# EAGLE board esp32_main_card (EAGLE 9.6.2)
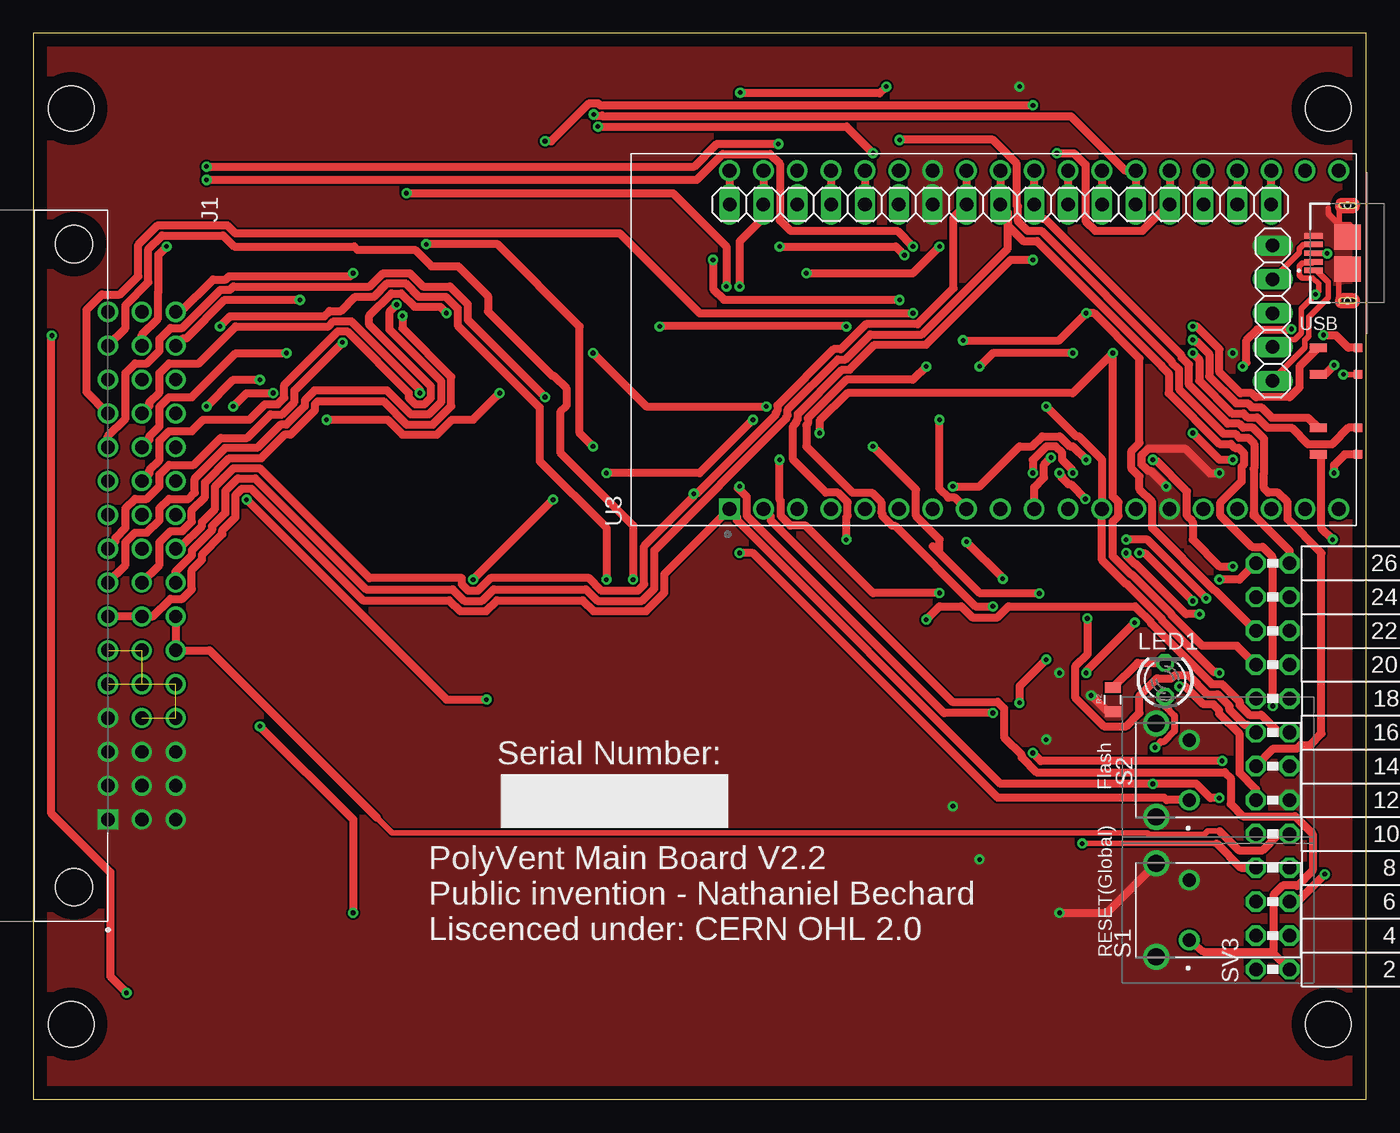
[diagram p0: board, top side]
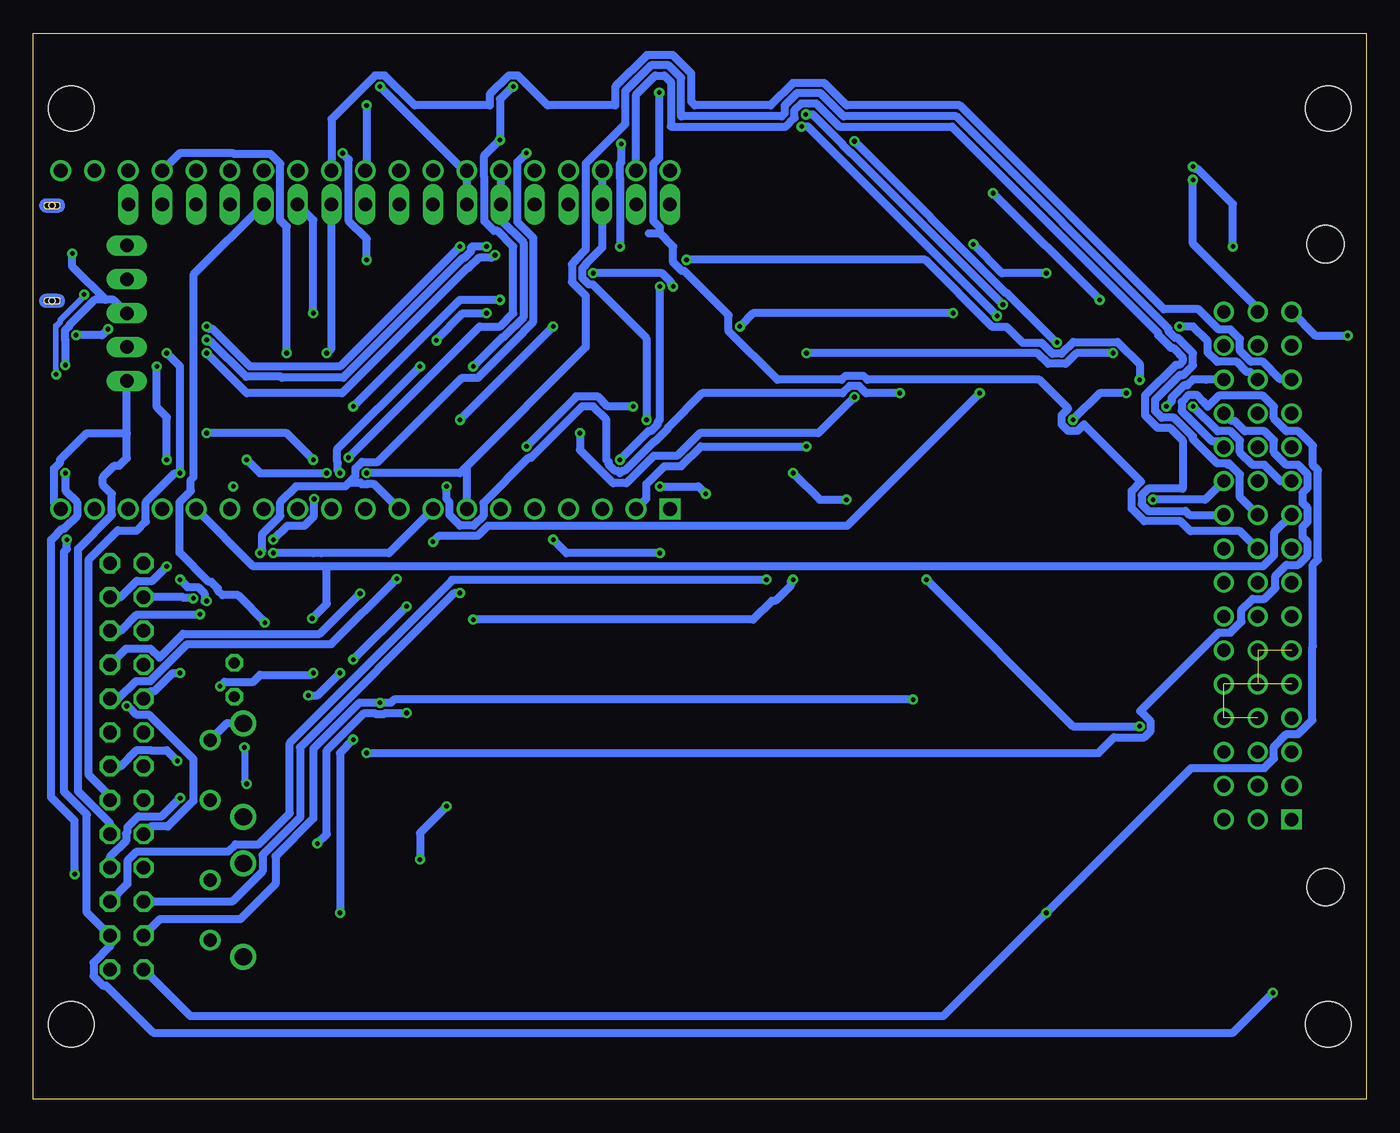
[diagram p1: board, bottom side, seen from below]

Size 100 x 80 mm. Coordinates in mm from the lower left corner, seen from the top.
Outline: 0,0 100,0 100,80 0,80 0,0
Copper layers (1*16): Top 0.035mm / dielectric 1.5mm / Bottom 0.035mm
Design rules "default": minimum track width 6mil, minimum drill 0.35mm, track to track 6mil, track to pad 6mil, pad to pad 6mil, via to via 6mil, smd to smd 6mil, copper to edge 40mil, drill to drill 6mil, minimum pad ring 10mil, minimum via ring 8mil, stop-mask expansion 4mil, vias tented up to drill 0mil, thermal gap 10mil
Net classes: 1 POWER: clearance 0.508 mm
Holes 3.4 mm at 2.84,5.64 2.84,74.36 97.16,74.36 97.16,5.64

## Footprints (pad centres in the part's own frame; a part is rotated, then mirrored left to right if it is on the bottom)
HARTING_09231486921 = drill 1 pad 1.35 square: 1 0,0 | drill 1 pad 1.35: 2 -2.54,0; 3 -5.08,0; 4 -7.62,0; 5 -10.16,0; 6 -12.7,0; 7 -15.24,0; 8 -17.78,0; 9 -20.32,0; 10 -22.86,0; 11 -25.4,0; 12 -27.94,0; 13 -30.48,0; 14 -33.02,0; 15 -35.56,0; 16 -38.1,0; 17 0,2.54; 18 -2.54,2.54; 19 -5.08,2.54; 20 -7.62,2.54; 21 -10.16,2.54; 22 -12.7,2.54; 23 -15.24,2.54; 24 -17.78,2.54; 25 -20.32,2.54; 26 -22.86,2.54; 27 -25.4,2.54; 28 -27.94,2.54; 29 -30.48,2.54; 30 -33.02,2.54; 31 -35.56,2.54; 32 -38.1,2.54; 33 0,5.08; 34 -2.54,5.08; 35 -5.08,5.08; 36 -7.62,5.08; 37 -10.16,5.08; 38 -12.7,5.08; 39 -15.24,5.08; 40 -17.78,5.08; 41 -20.32,5.08; 42 -22.86,5.08; 43 -25.4,5.08; 44 -27.94,5.08; 45 -30.48,5.08; 46 -33.02,5.08; 47 -35.56,5.08; 48 -38.1,5.08 | hole 2.8: -43.18,-2.54; 5.08,-2.54
GCT_USB3090-XX-X_REVE = smd 0.4 x 1.4: 1 -1.3,2.55; 2 -0.65,2.55; 3 0,2.55; 4 0.65,2.55; 5 1.3,2.55 | smd 0.1 x 0.1: 6 -3.87,0.63; 7 3.51,0.72 | smd 1.9 x 2: 8 -1.2,0; 9 1.2,0 | hole 0.45: -3.575,0; 3.575,0
1X17 = drill 1.016 long: 1 -20.32,0; 2 -17.78,0; 3 -15.24,0; 4 -12.7,0; 5 -10.16,0; 6 -7.62,0; 7 -5.08,0; 8 -2.54,0; 9 0,0; 10 2.54,0; 11 5.08,0; 12 7.62,0; 13 10.16,0; 14 12.7,0; 15 15.24,0; 16 17.78,0; 17 20.32,0
1X05 = drill 1.016 long: 1 -5.08,0; 2 -2.54,0; 3 0,0; 4 2.54,0; 5 5.08,0
LED3MM = drill 0.813 octagon: A -1.27,0; K 1.27,0
0805 = smd 0.8 x 1.2: 1 -0.9,0; 2 0.9,0
FSMRA4JH04 = drill 0.99 pad 1.54: 1 -2.54,-2.54; 2 1.96,-2.54 | drill 1.3 pad 1.95: 3 3.215,-0.05; 4 -3.795,-0.05
FE13-2W = drill 1.016 octagon: 1 -15.24,1.27; 2 -15.24,-1.27; 3 -12.7,1.27; 4 -12.7,-1.27; 5 -10.16,1.27; 6 -10.16,-1.27; 7 -7.62,1.27; 8 -7.62,-1.27; 9 -5.08,1.27; 10 -5.08,-1.27; 11 -2.54,1.27; 12 -2.54,-1.27; 13 0,1.27; 14 0,-1.27; 15 2.54,1.27; 16 2.54,-1.27; 17 5.08,1.27; 18 5.08,-1.27; 19 7.62,1.27; 20 7.62,-1.27; 21 10.16,1.27; 22 10.16,-1.27; 23 12.7,1.27; 24 12.7,-1.27; 25 15.24,1.27; 26 15.24,-1.27
MODULE_ESP32-DEVKITC-32D = drill 1.04 square: 1 -12.7,19.76 | drill 1.04: 2 -12.7,17.22; 3 -12.7,14.68; 4 -12.7,12.14; 5 -12.7,9.6; 6 -12.7,7.06; 7 -12.7,4.52; 8 -12.7,1.98; 9 -12.7,-0.56; 10 -12.7,-3.1; 11 -12.7,-5.64; 12 -12.7,-8.18; 13 -12.7,-10.72; 14 -12.7,-13.26; 15 -12.7,-15.8; 16 -12.7,-18.34; 17 -12.7,-20.88; 18 -12.7,-23.42; 19 -12.7,-25.96; 20 12.7,19.76; 21 12.7,17.22; 22 12.7,14.68; 23 12.7,12.14; 24 12.7,9.6; 25 12.7,7.06; 26 12.7,4.52; 27 12.7,1.98; 28 12.7,-0.56; 29 12.7,-3.1; 30 12.7,-5.64; 31 12.7,-8.18; 32 12.7,-10.72; 33 12.7,-13.26; 34 12.7,-15.8; 35 12.7,-18.34; 36 12.7,-20.88; 37 12.7,-23.42; 38 12.7,-25.96
CL-SB-23A-11T = smd 0.635 x 1.27: 1 2.5,3.4; 2 4.5,3.4; 5 10.5,3.4; 6 8.5,3.4 | smd 0.635 x 0.635: 3 2.5,0.4; 4 4.5,0.4; 7 10.5,0.4; 8 8.51,0.4

## Placement (x,y rotation side)
J1  09231486921  [HARTING_09231486921]  5.6,21 270 top
J2  USB3090-XX-X_REVE  [GCT_USB3090-XX-X_REVE]  98.6,63.5 90 top
JP1  [1X17]  72.56,67.16 180 top
JP2  [1X05]  93,59 270 top
LED1  [LED3MM]  84.93,31.49 90 top
R2  180  [0805]  81,30 90 top
S1  FSMRA4JH04  [FSMRA4JH04]  84.2,14.5 90 top
S2  FSMRA4JH04  [FSMRA4JH04]  84.2,25 90 top
SV3  [FE13-2W]  93,25 90 top
U3  ESP32-DEVKITC-32D  [MODULE_ESP32-DEVKITC-32D]  72,57 90 top
U$1  CL-SB-23A-11T  [CL-SB-23A-11T]  99.8,45.9 90 top

## Library data of the parts
J1 = din41612_48_pin_board; MANUFACTURER-PART-NUMBER: 09231486921; PACKAGE: None
J2 = USB3090-XX-X_REVE; MANUFACTURER-PART-NUMBER: USB3090-30-A; PACKAGE: None; SIMILAR-COMPONENTS: MCR-B-S-RA-SMT-CS5A-NF-T/R
JP1 = pinhead; MANUFACTURER-PART-NUMBER: SLW-117-01-T-S; PACKAGE: 2.54 mm header; SIMILAR-COMPONENTS: https://www.adafruit.com/product/3008
JP2 = pinhead
LED1 = led; MANUFACTURER-PART-NUMBER: Generic green 3mm LED; PACKAGE: none
R2 = SparkFun-Passives; MANUFACTURER-PART-NUMBER: Generic; PACKAGE: 0805; SIMILAR-COMPONENTS: Generic 0805 resistors
S1 S2 = FSMRA4JH04; MANUFACTURER-PART-NUMBER: FSMRA4JH04; PACKAGE: None
SV3 = con-lsta; MANUFACTURER-PART-NUMBER: generic 13x2 right angle header, male or female; PACKAGE: 13x2 2.54mm header
U3 = ESP32-DEVKITC-32D; MANUFACTURER-PART-NUMBER: ESP32-DEVKITC-32D, SLW-119-01-T-S < buy two of these; PACKAGE: None; SIMILAR-COMPONENTS: none, https://www.adafruit.com/product/3008
U$1 = CL-SB-23A-11T; MANUFACTURER-PART-NUMBER: CL-SB-23A-11T; PACKAGE: None

## Nets
3.3V: J1.7 J1.23 LED1.A SV3.8 U3.1
5V: J1.38 J1.39 J2.1 JP2.5 SV3.10 U3.19
24V/12V [POWER]: J1.5 J1.6 J1.20 J1.21 J1.22 J1.36 J1.37
CS_1: J1.8 JP1.5 SV3.11 U3.32
CS_2: J1.9 JP1.8 SV3.13 U3.29
CS_3: J1.10 SV3.15 U3.15
CS_4: J1.11 SV3.17 U3.12
CS_5: J1.12 JP1.2 SV3.19 U3.35
CS_6: J1.13 JP1.6 SV3.21 U3.31
CS_7: J1.14 JP1.7 SV3.23 U3.30
CS_8: J1.24 SV3.25 U3.9
CS_9: J1.25 SV3.26 U3.10
CS_10: J1.26 SV3.24 U3.7
CS_11: J1.27 SV3.22 U3.8
CS_12: J1.28 SV3.20
CS_13: J1.29 SV3.18
CS_14: J1.30 SV3.16
CS_15: J1.45 SV3.14
GND: J1.1 J1.2 J1.3 J1.4 J1.17 J1.18 J1.19 J1.33 J1.34 J1.35 J2.5 J2.6 J2.7 J2.8 J2.9 JP1.11 JP2.1 R2.1 S1.2 S1.3 S1.4 S2.2 S2.3 S2.4 SV3.12 U3.14 U3.26
IO0: JP1.4 S2.1 U3.33
MISO: J1.41 JP1.10 SV3.7 U3.27
MOSI: J1.42 JP1.16 SV3.5 U3.21
N$1: J2.4 JP2.2
N$2: JP1.17 U3.20
N$3: JP1.14 U3.23
N$4: JP1.13 U3.24
N$6: JP1.3 U3.34
N$7: JP1.1 U3.36
N$9: LED1.K R2.2
RESET: J1.48 S1.1 SV3.2 U3.2
SCK: J1.40 JP1.9 SV3.9 U3.28
SCL: J1.44 JP1.15 SV3.1 U3.22
SDA: J1.43 JP1.12 SV3.3 U3.25
USB0_D+_IN: J2.3 JP2.3 U$1.6
USB0_D-_IN: J2.2 JP2.4 U$1.8
USB1_D+: J1.16 SV3.4 U$1.1
USB1_D-: J1.15 SV3.6 U$1.3
USB2_D+: J1.32 U$1.2
USB2_D-: J1.31 U$1.4
USB3_D+: J1.47 U$1.5
USB3_D-: J1.46 U$1.7

## Tracks (layer width: path | path; a pad name or v marks a point on that pad's centre or on a via)
3.3V  (via drill 0.35)
  Top 0.508: LED1.A 84.93,29.49 85.63,28.79 85.63,27.64 84.82,26.83 84.59,26.83 v84.17,26.41
  Top 0.61: J1.7 J1.23 8.97,36.24 10.3,37.57 11.18,37.57 11.89,38.28 11.89,39.74 12.65,40.5 12.65,40.89 14.18,42.41 14.18,42.7 15.16,43.68 15.16,45.35 15.65,45.84 16.35,45.84 24.73,37.45 31.21,37.45 32.02,36.64 33.98,36.64 34.79,37.45 41.21,37.45 42.02,36.64 45.98,36.64 47.36,38.02 47.36,39.42 U3.1 52.78,43.76 52.78,43.47 72.57,23.68 v84,23.68 86.22,23.68 86.23,23.69 87.25,23.69 88.33,22.61 v88.99,22.61
  Bottom 0.508: v84.17,26.41 84.17,23.85 v84,23.68
  Bottom 0.61: v88.99,22.61 90.36,21.24 92.13,21.24 92.95,20.43 92.95,20.05 93.05,19.95 93.05,19.41 94.27,18.2 SV3.8
5V
  Top 0.406: JP2.5 93,54 95.41,56.41 95.41,56.98 95.69,57.27 95.69,58.69 97.16,60.16 97.16,61.34 96.3,62.2 J2.1 | 89,20.14 88.14,20.14 87.87,19.87 83.7,19.87 83.57,20 26.92,20 25.46,21.46
  Top 0.61: J1.39 J1.38 13.22,33.7 25.46,21.46 25.78,21.14 | SV3.10 93.45,19.92 92.23,18.7 90.44,18.7 89,20.14
  Bottom 0.61: SV3.10 94.27,20.74 96.66,23.12 96.66,41.31 94.12,43.85 94.12,45.44 94.8,46.12 94.8,46.7 93.94,47.56 93.55,47.56 93,48.12 93,50 | 93,50 JP2.5 | U3.19 98.44,44.78 98.44,47.35 98,47.79 98,48 96,50 93,50
24V/12V  (6 unrouted)
CS_1  (via drill 0.35)
  Top 0.61: J1.8 6.93,40.11 6.93,41.82 7.64,42.53 8.52,42.53 9.47,43.48 9.47,44.36 10.18,45.07 11.66,45.07 12.12,45.53 12.12,46.61 14.39,48.88 16.78,48.88 18.54,50.64 18.98,50.64 20.36,52.02 20.36,52.46 21.1,53.2 26.54,53.2 28.34,51.4 29.66,51.4 30.6,52.34 30.6,53.9 26.75,57.75 | v42.04,73.91 42.04,73.83 42.71,73.83 42.78,73.76 77.87,73.76 81.93,69.7 U3.32 JP1.5 | v79,32 79,32.14 v82.64,35.78 | 26.75,57.75 26.7,57.8 | 26.75,57.75 26.75,59.13 v27.26,59.64 | SV3.11 91.73,23.28 90.51,24.5 90.51,27.42 88.99,28.94 88.99,29.21 88.55,29.64 87.79,29.64 86.43,31 v86,31
  Bottom 0.61: v42.04,73.91 41.52,73.91 39.23,71.62 39.23,71.55 38.75,71.06 38.68,71.06 v27.26,59.64 | v82.64,35.78 82.64,35.82 84.65,37.84 85.83,37.84 86.17,38.16 86.17,38.35 86.65,38.84 86.83,38.84 89.04,41.04 89.04,44.81 88.19,45.66 88.19,46.49 88,46.68 88,61.88 JP1.5 | v86,31 85.66,31.34 83.51,31.34 83,31.85 79.15,31.85 v79,32
CS_2  (via drill 0.35)
  Top 0.61: J1.9 6.17,41.89 6.17,42.14 6.93,42.9 6.93,44.36 7.64,45.07 8.52,45.07 9.47,46.02 9.47,46.9 10.18,47.61 12.04,47.61 14.08,49.65 16.05,49.65 17.8,51.4 18.66,51.4 19.6,52.34 19.6,53.2 v23.2,56.8 | v75,74.6 42.54,74.6 42.39,74.74 41.7,74.74 38.85,71.9 v38.4,71.9 | SV3.13 93.05,26.32 94.78,26.32 95.05,26.6 95.8,26.6 96.66,27.46 96.66,41 94.12,43.54 94.12,44.81 93.39,45.54 92.66,45.54 92.34,45.86 92.34,47 92.36,47.02 92.36,49.56 91.51,50.41 90.79,50.41 90.49,50.71 89.62,50.71 86.71,53.62 86.71,55.16 86.65,55.16 86.17,55.65 86.17,55.81 75.93,66.05 75.42,66.05 75.1,66.37 JP1.8 U3.29
  Bottom 0.61: v75,74.6 75,69.8 U3.29 | v38.4,71.9 26.98,60.48 26.91,60.48 23.23,56.8 v23.2,56.8
CS_3  (via drill 0.35)
  Top 0.61: SV3.15 91.17,28.1 90.91,28.1 89.75,29.26 89.75,29.52 88.87,30.4 88.11,30.4 86.67,31.84 85.65,31.84 85.42,31.6 84.31,31.6 83,30.29 83,29 82,28 80.33,28 78.17,30.16 78.17,32.47 79.09,33.4 v79.09,36.09
  Bottom 0.61: J1.10 6.93,42.53 6.93,40.82 7.75,40 78,40 | U3.15 83.5,40 78,40 | v79.09,36.09 78,37.18 78,40
CS_4  (via drill 0.35)
  Top 0.61: v89,32 88.93,32.07 88.59,32.07 84.64,36.02 84.64,36.1 82.1,38.64 82.02,38.64 80.18,40.48 U3.12 80.18,48 78.42,49.76 78.24,49.76 v76,52 | v13,52 15,54 v17,54 | v51,63 51,60.82 51.82,60 v65,60
  Bottom 0.61: SV3.17 91.17,30.64 90.91,30.64 89.55,32 v89,32 | v13,52 11.15,50.15 10.18,50.15 9.47,49.44 9.47,48.56 8.52,47.61 7.64,47.61 6.43,46.4 J1.11 | v51,63 33.08,63 28.05,57.97 26.96,57.97 25.76,56.76 24.34,56.76 23.55,55.97 22.85,55.97 21.98,56.84 18.65,56.84 17,55.18 v17,54 | v65,60 68,60 v76,52
CS_5  (via drill 0.35)
  Top 0.61: SV3.19 90.31,34.03 87.71,34.03 85.4,36.34 85.4,36.42 82.42,39.4 82.34,39.4 81,40.74 81,43.37 81.42,43.79 81.42,44.81 81,45.23 v81,56 78,53 61.08,53 59,50.92 v59,50 | J1.12 5.6,49.77 6.93,51.1 6.93,54.52 7.64,55.23 8.52,55.23 9.47,56.18 9.47,57.06 10.3,57.89 11.18,57.89 14.05,60.76 14.76,60.76 15,61 25.25,61 26.25,62 28.23,62 29.24,61 31.26,61 32.6,59.66 32.6,58.5 v38.4,52.7 | U3.35 JP1.2
  Bottom 0.61: v81,56 81,65.49 81.48,65.98 81.48,70.21 82.21,70.94 84.94,70.94 85,71 89.04,71 U3.35 | v38.4,52.7 41.1,50 50,50 51.72,48.28 53.46,48.28 55.5,46.24 56.5,46.24 59,48.74 v59,50
CS_6  (via drill 0.35)
  Top 0.61: SV3.21 88.72,38.16 88.65,38.16 83.96,42.86 83.96,44.81 83,45.77 83,46.74 82.4,47.34 82.4,48.66 83,49.26 83,55.6 79.6,59 v79,59 76.96,56.96 v69.76,56.96 | J1.13 4,53.08 4,59.26 5.14,60.4 6.5,60.4 7.88,61.78 7.88,64.14 9.34,65.6 14.56,65.6 15.15,65 44,65 50,59 v66,59 | U3.31 JP1.6
  Bottom 0.61: v79,59 79,65.98 JP1.6 | v69.76,56.96 69.76,57.03 67.79,59 v66,59
CS_7  (via drill 0.35)
  Top 0.61: v88,37.6 83.6,42 v82,42 | v77,47 77.17,46.84 77.17,46.65 77.65,46.16 77.83,46.16 v78.94,45.06 | U3.30 JP1.7 | v78,56 72,56 v71,55
  Bottom 0.61: J1.14 6.43,54.02 7.76,55.35 8.64,55.35 9.47,56.18 9.47,57.06 10.18,57.77 11.06,57.77 12.59,59.3 15.2,59.3 30.5,74.6 38.98,74.6 40.65,76.27 43.02,76.27 44.69,74.6 50.37,74.6 50.64,74.88 50.64,76.98 52.02,78.36 53.98,78.36 56.36,75.98 56.36,74.6 61.42,74.6 63.65,76.83 64.35,76.83 65.76,75.42 65.76,74.6 71.4,74.6 73.64,76.83 74.36,76.83 77.64,73.56 U3.30 | v82,42 80.94,43.06 79.67,43.06 78.94,43.79 v78.94,45.06 | SV3.23 88.78,37.7 88.71,37.63 88.03,37.63 v88,37.6 | v77,47 77.17,47.16 77.17,47.78 77.19,47.81 77.19,48.8 v71,55 | v78,56 77.64,56.36 JP1.7
CS_8  (via drill 0.35)
  Top 0.61: J1.24 9.47,40.11 9.47,41.82 10.3,42.65 11.18,42.65 11.89,43.36 11.89,44.23 12.88,45.22 12.88,46.29 14.71,48.12 17.1,48.12 18.86,49.88 19.29,49.88 21.12,51.71 21.12,52.14 21.36,52.39 26.28,52.39 28.02,50.64 29.98,50.64 31.36,52.02 31.36,54.22 27.7,57.88 v27.7,58.8 27.68,58.8 | v42.36,73 61.03,73 v63.01,71.01 | SV3.25 90.49,39 v89,39 | v83,41 83.4,41 v87,37.4
  Bottom 0.61: v42.36,73 41.9,73 v27.7,58.8 | v87,37.4 87.17,37.4 87.17,37.95 87.65,38.44 88.44,38.44 v89,39 | v83,41 82.83,41.16 82.83,42.44 81.48,43.79 81.48,44.81 80.3,46 76.61,46 76.31,46.3 | v63.01,71.01 63.69,70.34 63.69,65.84 62.48,64.63 62.48,58.37 63.24,57.61 63.24,57.58 66.65,54.16 67.83,54.16 74.17,47.84 75.35,47.84 75.83,47.35 75.83,46.77 76.31,46.3 | 76.31,46.3 75.49,46.3 75.35,46.16 75,46.16 74.42,46.16 U3.9
CS_9  (via drill 0.35)
  Top 0.61: SV3.26 94.27,41.16 91.64,43.79 91.64,43.93 91.58,44 | v65,72 72.01,72 73.8,70.21 73.8,67.08 73.88,67 73.88,65.89 74.59,65.18 75.62,65.18 85.4,55.4 85.4,55.34 85.95,54.79 85.95,53.31 89.31,49.95 90.17,49.95 90.47,49.65 91.15,49.65 91.6,49.2 91.6,47.34 91.58,47.32 91.58,44 | 91.58,44 91.58,43.79 | v64,76 63.49,75.49 53.1,75.49 v53.04,75.55 | U3.10 75.1,45.92 75.83,46.65 75.83,47.63 v76.36,48.16
  Bottom 0.61: J1.25 9.47,42.65 13.18,42.65 13.94,43.4 16.66,43.4 17.6,44.34 17.6,45.66 16.9,46.36 21.18,50.64 21.65,50.16 22.35,50.16 22.84,50.65 22.84,51.35 22.36,51.82 24.53,54 37.44,54 37.74,54.3 39.06,54.3 39.36,54 44.18,54 47.84,57.65 47.84,58.84 51.16,62.16 51.35,62.16 52,62.82 52,64 53,65 | 53.82,65 53,65 | 53,65 53,65.43 53.48,65.91 53.48,70.21 53.04,70.65 v53.04,75.55 | v64,76 64.06,76 65,75.06 v65,72 66.18,70.82 66.18,69.19 66.16,69.17 66.16,65.89 65.44,65.18 65.18,65.18 64,64 64,59 65,58 66.52,58 v76.36,48.16
CS_10  (via drill 0.35)
  Top 0.61: v78,47 77.93,47.07 77.93,47.26 77.19,47.99 77.19,48.51 76.71,48.99 76.01,48.99 75,47.98 v75,47 | v90,40 89,40 87,42 87,43.35 86.56,43.79 86.56,45.62 84.25,47.93 84.07,47.93 v84,48
  Bottom 0.61: 10.18,47.61 9.47,46.9 9.47,45.19 J1.26 | 10.18,47.61 10.35,47.61 | 10.18,47.61 10.3,47.73 11.18,47.73 13,49.55 13,49.74 14.42,51.16 15.35,51.16 15.84,51.65 15.84,52.5 13.98,54.36 13.72,54.36 13,55.08 13,56 14.16,57.16 14.35,57.16 14.84,57.65 14.84,57.84 30.76,73.76 39.22,73.76 40.97,75.51 42.71,75.51 43.64,74.57 43.64,73.98 43.86,73.76 51.4,73.76 51.4,76.66 52.34,77.6 53.66,77.6 55.6,75.66 55.6,73.18 58.56,70.22 58.56,63.77 59.33,63 59.33,62.93 59.6,62.66 59.6,61.34 58.56,60.3 58.56,56.44 67.48,47.52 | SV3.24 93.45,37.7 92.23,38.92 91.08,38.92 v90,40 | v84,48 83,47 v78,47 | U3.7 67.48,47.52 | 67.48,47.52 68,47 v75,47
CS_11  (via drill 0.35)
  Top 0.61: v87.51,36.41 86.49,36.41 82.73,40.16 82.65,40.16 82,40.82 v82,41 | J1.27 8.71,46.97 8.71,47.22 9.47,47.98 9.47,49.44 10.18,50.15 11.89,50.15 12.74,51 16.22,51 17.38,52.16 18.35,52.16 18.84,52.65 18.84,53.62 22.85,57.63 23.55,57.63 28.16,53.02 28.16,52.65 28.65,52.16 29.35,52.16 29.84,52.65 29.84,53.5 25.2,58.14 25.2,58.8 26.88,60.48 27.6,60.48 28.61,59.48 30.52,59.48 v31,59 | v47,58 47.04,58.04 60.96,58.04 v61,58 | U3.8 69.16,45.16 68.65,45.16 68,45.82 v68,51
  Bottom 0.61: SV3.22 93.45,35.16 92.23,36.38 87.54,36.38 v87.51,36.41 | v82,41 79,41 78.4,41 73.32,41 U3.8 | v31,59 46,59 v47,58 | v68,51 v61,58
CS_12  (via drill 0.35)
  Top 0.61: v75.49,37.97 71.03,37.97 68,41 | 67.48,41.52 68,41 | v19,56 15.2,56 11.89,52.69 10.18,52.69 9.47,51.98 9.47,50.52 8.71,49.76 8.71,49.51 J1.28 | v42,56 46,52 v55,52 | 68,41 68,42.03 66.24,43.79 66.24,45.76 v63,49
  Bottom 0.61: SV3.20 93.05,33.84 91.22,33.84 90.55,33.16 88.78,34.93 78.53,34.93 v75.49,37.97 | v19,56 21.74,56 22.54,55.2 23.86,55.2 24.66,56 v42,56 | v55,52 56.92,52 57.68,52.76 59.32,52.76 59.32,52.68 v63,49
CS_13  (via drill 0.35)
  Top 0.61: v72.74,39.06 72.74,39.12 v70.02,41.84 | J1.29 8.71,52.05 8.71,52.3 9.47,53.06 9.47,54.52 10.18,55.23 12.41,55.23 15.18,58 22.14,58 22.54,58.4 23.86,58.4 29,53.26 v29,53
  Bottom 0.61: SV3.18 93.62,30.08 92.3,31.4 91.22,31.4 88.46,34.16 77.66,34.16 72.76,39.06 v72.74,39.06 | v29,53 38.94,43.06 65.89,43.06 66.65,42.3 69.56,42.3 v70.02,41.84
CS_14  (via drill 0.35)
  Top 0.61: v43,39 43,42.9 38,47.9 38,51.92 31.84,58.08 31.84,59.35 30.94,60.24 28.92,60.24 27.92,61.24 26.56,61.24 25.56,60.24 24.16,60.24 23.08,59.16 22.22,59.16 21.82,58.76 14.76,58.76 v14,58 | SV3.16 93.45,27.54 92.13,28.86 91.22,28.86 90.51,29.57 90.51,29.84 89.18,31.16 88.42,31.16 83.88,35.71 83.88,35.78 82.66,37 73.18,37 72.35,36.16 70.46,36.16 69.62,37 68,37 v67,36
  Bottom 0.61: J1.30 8.71,54.59 8.96,54.59 9.72,55.35 11.18,55.35 11.89,56.06 11.89,56.89 13,58 v14,58 | v67,36 46,36 44.6,37.4 44.34,37.4 43.16,38.58 43.16,38.84 v43,39
CS_15  (via drill 0.35)
  Top 0.61: v89.2,25.4 75.6,25.4 v75,26
  Bottom 0.61: SV3.14 93.45,25 92.23,26.22 91.22,26.22 91.21,26.2 90,26.2 v89.2,25.4 | v75,26 20.09,26 18.93,27.16 16.65,27.16 16.16,27.65 16.16,28.35 16.96,29.14 11.06,35.03 10.18,35.03 9.35,35.86 9.35,36.74 8.52,37.57 7.64,37.57 6.81,38.4 6.81,39.28 5.98,40.11 5.1,40.11 4.39,40.82 4.39,41.82 4.76,42.2 4.76,42.98 4.39,43.36 4.39,44.36 4.76,44.73 4.76,45.52 4.39,45.9 4.39,46.9 5.1,47.61 5.98,47.61 6.93,48.56 6.93,49.44 7.64,50.15 9.1,50.15 9.86,50.91 10.11,50.91 J1.45
GND  (via drill 0.35)
  Top 0.406: 98,62 97.97,61.97 J2.6 | J2.7 98,66.89 98,65 | 98,65.63 98,65.3 J2.9 98.78,64.88 98.78,65.63 98,65.63 | 97.16,66.89 97.16,66.48 98,65.63
  Top 0.61: v85,46 83.83,47.16 83.65,47.16 83.17,47.65 83.17,48.35 83.65,48.84 86.42,48.84 88.26,47 v89,47 | R2.1 80.59,29.1 v79.37,30.32 | v77,14 80.53,14 S1.3
  Bottom 0.61: SV3.12 94.27,22.77 95.84,24.35 95.84,40.52 93.66,42.71 92.22,42.71 91.58,43.35 91.58,44.81 89.39,47 v89,47 89,55 v90,56 | 84.96,46 v85,46 | JP1.11 67.48,69.48 v74,76 | v79.37,30.32 78.68,30.32 v77,32 | v76,27 77,26 v77,14 | S2.3 85.48,28.21 S2.2 | v69,22 71,20 v71,18
  pour Top (no thermals): 0,0 0,80 100,80 100,0
IO0  (via drill 0.35)
  Top 0.61: U3.33 JP1.4 85.21,67.16 83.22,65.18 79.67,65.18 78.94,65.91 78.94,70.15 78.09,71 v76.81,71 | S2.1 85.02,22.46 84.84,22.64 72.36,22.64 54,41 v53,41 | v61,42 61,43.69 61.1,43.79 61.1,44.81 60.37,45.54 59.46,45.54 57,48 57,50.52 57.24,50.76 57.24,50.9 57.36,51.02 57.36,51.44 60.68,54.76 61.24,54.76 63.12,56.64 66.98,56.64 73.34,63 v75,63
  Bottom 0.61: v61,42 60,41 v53,41 | v75,63 75,64.57 76.34,65.91 76.34,70.53 v76.81,71
MISO  (via drill 0.35)
  Top 0.406: 88.8,19.2 v78.7,19.2
  Top 0.61: v72,29 68.33,29 53.54,43.79 53.54,45.2 52.87,45.87 v53,46 | U3.27 JP1.10 69.06,66.19 69.06,60.87 66.35,58.16 62.47,58.16 60.59,56.29 60.05,56.29 55.84,52.07 55.84,51.65 55.71,51.53 55.71,51.41 49.76,45.45 v49.55,45.45 49.55,45.24 45.84,41.53 45.84,38.65 45.35,38.16 42.65,38.16 41.7,39.12 34.3,39.12 33.35,38.16 32.65,38.16 32.16,38.65 32.16,39.12 25.22,39.12 16.98,47.36 15.02,47.36 13.64,45.98 13.64,44.32 12.65,43.33 12.65,43.04 11.13,41.52 11.13,41.51 10.94,41.32 J1.41 | SV3.7 90.62,17.38 88.8,19.2
  Bottom 0.61: v78.7,19.2 78,19.9 78,26.18 75.18,29 74.42,29 74.35,28.93 73.65,28.93 73.58,29 v72,29 | v53,46 50.11,46 v49.55,45.45
MOSI  (via drill 0.35)
  Top 0.61: v68,38 63,38 57.94,43.06 56.81,43.06 56.08,43.79 56.08,44.92 56,45 v56,48 | v53,61 53,64.38 54.78,66.16 JP1.16 U3.21
  Bottom 0.61: J1.42 13.25,43.86 13.56,44.16 16.35,44.16 16.84,44.65 16.84,45.35 16.35,45.84 13.76,45.84 13.76,49.42 14.74,50.4 15.66,50.4 16.6,51.34 16.6,52.82 14.29,55.12 14.03,55.12 13.76,55.39 13.76,55.68 14.48,56.4 14.66,56.4 15.6,57.34 15.6,57.52 31.08,73 39.54,73 41.28,74.74 42.39,74.74 42.88,74.25 42.88,73.66 43.54,73 52.16,73 52.16,76.35 52.65,76.83 53.35,76.83 54.78,75.4 U3.21 | v53,61 53,51 53.16,50.84 53.16,50.65 53.65,50.16 53.84,50.16 v56,48 | 91.73,14.86 SV3.5 85.1,14.84 82.82,17.12 82.82,18.34 80,21.16 80,26.43 68.43,38 v68,38
N$1
  Top 0.406: J2.4 96,64.15 95.3,64.15 94.99,63.85 94.99,63.53 JP2.2
N$2
  Top 0.61: U3.20 JP1.17
N$3
  Top 0.61: U3.23 JP1.14
N$4
  Top 0.61: U3.24 JP1.13
N$6
  Top 0.61: U3.34 JP1.3
N$7
  Top 0.61: JP1.1 U3.36
N$9
  Top 0.61: R2.2 82.86,32.76 LED1.K
RESET  (via drill 0.35)
  Top 0.61: v24,62 23.76,61.76 14.68,61.76 14.45,61.52 13.49,61.52 11.06,59.1 J1.48 | U3.2 55.32,43.76 55.32,43.47 68.96,29.84 72.35,29.84 72.83,29.35 72.83,27.16 74.17,25.84 74.17,25.65 75.28,24.54 89.42,24.54 89.83,24.13 89.83,22.16 90.76,21.24 94.67,21.24 96,19.91 96,17.17 94.83,16 94.78,16.06 93.77,16.06 93.05,15.35 93.05,10.98 | v42,49 41,50 41,58 34.84,64.17 v29.48,64.17 | S1.1 87.8,11.08 92.95,11.08 93.05,10.98 | 93.05,10.98 SV3.2
  Bottom 0.61: v24,62 27.32,62 v29.48,64.17 | U3.2 54,45.08 54,46.18 52.66,47.52 51.4,47.52 49.92,49 v42,49
SCK  (via drill 0.35)
  Top 0.61: v93,29.52 92.95,29.57 92.95,40.74 92.23,41.46 91.43,41.46 89.04,43.85 89.04,44.75 90.64,46.35 90.64,47.46 90.83,47.65 90.83,48.5 90.44,48.89 90.16,48.89 89.86,49.19 88.99,49.19 85.19,52.99 85.19,54.47 84.64,55.02 84.64,55.08 75.3,64.42 74.28,64.42 73.12,65.58 | U3.28 JP1.9 73.12,66.6 73.12,65.58 | 73.12,65.58 73.12,63.86 66.66,57.4 62.8,57.4 60.92,55.52 60.37,55.52 56.6,51.75 56.6,51.34 56.48,51.22 56.48,51.08 46.6,41.2 46.6,38.34 45.66,37.4 42.34,37.4 41.46,38.28 34.54,38.28 33.66,37.4 32.34,37.4 31.46,38.28 24.98,38.28 16.66,46.6 15.34,46.6 14.4,45.66 14.4,44 13.41,43.01 13.41,42.73 11.89,41.2 11.89,40.82 10.68,39.61 J1.40
  Bottom 0.61: SV3.9 91.17,20.48 89.91,20.48 88,22.39 88,25.53 91.33,28.86 92.23,28.86 92.9,29.52 v93,29.52
SCL  (via drill 0.35)
  Top 0.61: v54,51 50,47 v43,47 | v39,45 v33,39 | v17,28 24,21 v24,14
  Bottom 0.61: SV3.1 88.23,6.26 31.74,6.26 v24,14 13.13,24.87 7.64,24.87 6.93,25.58 6.93,26.46 5.98,27.41 5.1,27.41 4.03,28.47 4.03,33.97 4,34 4,40.13 3.63,40.5 3.63,47.22 4,47.59 4,49.05 5.1,50.15 5.98,50.15 6.93,51.1 6.93,51.98 7.76,52.81 11.06,52.81 11.89,51.98 12.16,52.26 12.16,52.35 12.65,52.84 13.35,52.84 13.84,52.35 13.84,51.65 11.57,49.39 11.13,49.39 J1.44 | U3.22 JP1.15 57.32,63.93 58.57,62.68 58.57,62.61 58.84,62.35 58.84,61.65 58.35,61.16 58.05,61.16 54,57.12 v54,51 | v43,47 41,45 v39,45 | v33,39 22,28 v17,28
SDA  (via drill 0.35)
  Top 0.61: v16,45 31,30 v34,30 | v67,55 66,54 61,54 58.12,51.12 58.12,50.71 58,50.59 58,49 61.46,45.54 62.91,45.54 63.64,44.81 63.64,44.07 63.7,44 63.7,43.79 64.43,43.06 64.64,43.06 70.7,37 v72,37 | v76,33 74,31 v74,29.76
  Bottom 0.61: J1.43 12.08,45 v16,45 | v34,30 72.95,30 73.19,29.76 v74,29.76 75.55,29.76 79,26.31 79,21.08 81.83,18.25 81.83,16.16 84.48,13.52 90.51,13.52 SV3.3 | U3.25 JP1.12 64.94,66.02 63.24,64.32 63.24,58.68 64.68,57.24 64.76,57.24 v67,55 | v72,37 v76,33
USB0_D+_IN  (via drill 0.35)
  Top 0.406: v97.08,63.48 96.08,63.48 J2.3
  Top 0.61: v97.6,55.1 96.9,54.4 U$1.6
  Bottom 0.61: JP2.3 94,60 94.59,60 | v97.08,63.48 97.08,62.49 94.59,60 | 94.59,60 95.4,60 97.34,58.06 97.34,57.99 97.64,57.69 97.64,57 97.6,56.97 v97.6,55.1
USB0_D-_IN  (via drill 0.35)
  Top 0.406: J2.2 95.96,62.76 95.21,62.76 94.99,62.55 94.99,61.85 95.21,61.64 96,61.64 96.44,61.2 96.44,60.64 v96.2,60.4 95.13,59.33 95.13,57.5 94.66,57.02 93.56,57.02 JP2.4 | v98.31,54.41 v98.3,54.4 U$1.8
  Bottom 0.406: v98.3,54.4 98.3,54.76 98.33,54.8 98.33,58 | 98.33,58.07 98.33,58 | 98.33,58 98,58.33 98,58.48 96.2,60.28 v96.2,60.4
USB1_D+  (via drill 0.35)
  Top 0.61: v7,8 5.78,9.22 5.78,17.05 1.32,21.51 1.32,57.32 v1.39,57.32 | v97.49,42 96.66,42.84 96.66,48.14 U$1.1
  Bottom 0.61: J1.16 3.82,57.32 v1.39,57.32 | v7,8 10,5 91,5 94.54,8.54 94.78,8.54 95.49,9.26 95.49,10.27 94.27,11.48 SV3.4 96,14.03 96,21.39 97.69,23.08 97.69,41.1 97.49,41.3 v97.49,42
USB1_D-  (via drill 0.35)
  Top 0.61: J1.15 6.93,57.89 6.93,59.6 8.64,61.31 8.64,63.82 9.65,64.83 14.24,64.83 15.08,64 24.08,64 24.32,63.76 28.63,63.76 29.87,62.52 31.89,62.52 34.12,60.29 34.12,59.13 38.96,54.3 39.06,54.3 40,53.36 40,52.04 39.52,51.56 39.52,48.56 45,43.08 v45,39 | 97.61,47.19 v97.61,47 97.61,47.61 98.4,48.4 U$1.3 | v96.91,16.9 94.85,14.84 SV3.6
  Bottom 0.61: v45,39 68.61,39 68.61,38.9 80.76,26.75 80.76,21.48 83.09,19.15 84.84,19.15 85.39,18.6 92.23,18.6 92.95,17.89 92.95,16.16 SV3.6 | v97.61,47 97.61,45.7 96.72,44.81 96.72,43.79 97.67,42.84 97.84,42.84 98.68,41.99 98.68,22.68 96.91,20.91 v96.91,16.9 96.98,16.97
USB2_D+  (via drill 0.35)
  Top 0.61: v66,64 64.82,65.18 56.81,65.18 56.02,65.98 56.02,70.21 55.29,70.94 51.73,70.94 49.79,69 v13,69 | v87,57 87.17,56.84 87.35,56.84 88.24,55.94 88.24,54.25 90.25,52.24 91.12,52.24 91.42,51.94 92.14,51.94 92.92,51.16 95.64,51.16 U$1.2
  Bottom 0.61: J1.32 8.14,59.35 13,64.21 v13,69 | v66,64 67.08,64 67.17,63.91 67.17,63.65 67.65,63.16 67.76,63.16 76.76,54.16 81.35,54.16 81.42,54.24 84.06,54.24 86.65,56.84 86.83,56.84 v87,57
USB2_D-  (via drill 0.35)
  Top 0.61: J1.31 8.14,57.39 9.35,58.6 9.35,60.55 9.4,60.6 9.4,63.4 v10,64 | v55.9,71.7 51.3,71.7 49.6,70 v13,70 | v56,64 64.72,64 v65.36,63.36 | v87,56 87.48,55.52 87.48,53.94 89.94,51.48 90.8,51.48 91.1,51.18 91.82,51.18 92.6,50.4 94.42,50.4 95.64,49.17 97.45,49.17 98.68,50.4 U$1.4
  Bottom 0.61: v13,70 12.84,69.83 12.65,69.83 10,67.18 v10,64 | v55.9,71.7 55.9,70.33 56.02,70.21 56.02,69.19 56,69.17 v56,64 | v65.36,63.36 65.46,63.36 65.65,63.16 66.58,63.16 67.34,62.4 67.44,62.4 76.84,53 84,53 v87,56
USB3_D+  (via drill 0.35)
  Top 0.61: J1.47 11.25,57.13 11.5,57.13 14.37,60 v20,60 | v28,68 48,68 52,64 v52,61 | v58,62 66,62 v68,64 | v87,58 87.3,58 89,56.3 89,54.57 90.57,53 91.43,53 91.73,52.7 94.27,52.7 95,53.43 95,55 U$1.5
  Bottom 0.61: v20,60 v28,68 | v52,61 52.16,61.16 52.16,61.35 52.82,62 v58,62 | v87,58 86.83,57.84 86.58,57.84 83.74,55 77,55 v68,64
USB3_D-  (via drill 0.35)
  Top 0.61: v15,52 16,53 v18,53 | v35,53 33,51 31.41,51 30.29,49.88 27.71,49.88 26.59,51 v22,51 | v69,46 71,46 74,49 74.94,49 75.7,49.76 77.02,49.76 77.78,49 78,49 v79,48 | v87,50 89,48 v90,48 | v94.4,57.8 94.29,57.8 94.27,57.78 91.83,57.78 91.02,56.97 91.02,55.28 v90.74,55 | v96.8,57.35 97.73,57.35 98.68,56.4 U$1.7
  Bottom 0.61: J1.46 11.98,54.02 | 11.98,54.02 12,54 | 11.98,54.02 12.98,54.02 13.4,53.6 13.66,53.6 14.6,52.66 14.6,52.4 v15,52 | v18,53 20,53 v22,51 | v35,53 37.52,53 38.05,53.53 38.75,53.53 39.28,53 49.82,53 52.4,50.42 52.4,50.34 53.34,49.4 53.42,49.4 55.65,47.16 55.84,47.16 56,47 56.16,47.16 56.35,47.16 56.84,47.65 56.84,47.84 57,48 57,51 58,52 58.82,52 62.65,48.16 62.84,48.16 66.24,44.76 66.24,43.79 66.97,43.06 67.99,43.06 68.78,43.85 68.78,44.81 69,45.03 v69,46 | v79,48 81,50 v87,50 | v90,48 90,51.2 90.74,51.94 v90.74,55 | v94.4,57.8 94.85,57.35 v96.8,57.35

## Text on the board
tPlace: Flash
tNames: USB | Serial Number: | PolyVent Main Board V2.2 / Public invention - Nathaniel Bechard / Liscenced under: CERN OHL 2.0 | RESET(Global)